# Altium PCB PJ1301-002-A2.PcbDoc
Units mm, origin at the board's own origin, x right, y up, seen from the top; angles counter-clockwise.
Board outline 130 x 50 mm, 4 copper layers (Top Layer, GND, POWER, Bottom Layer), stack 1.602 mm thick; 62 components, 47 nets, 271 pads, 269 vias.
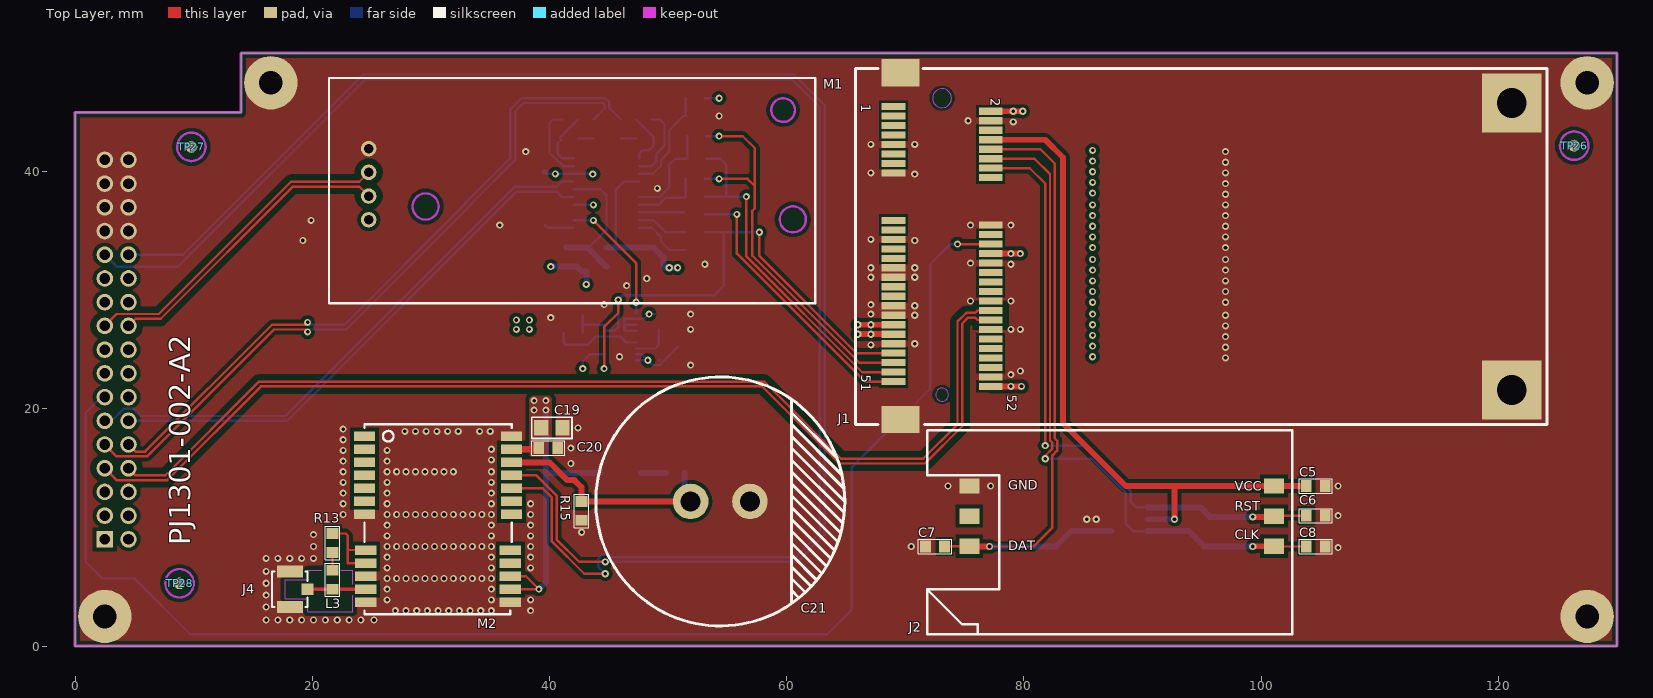
[diagram p0: Top Layer view]
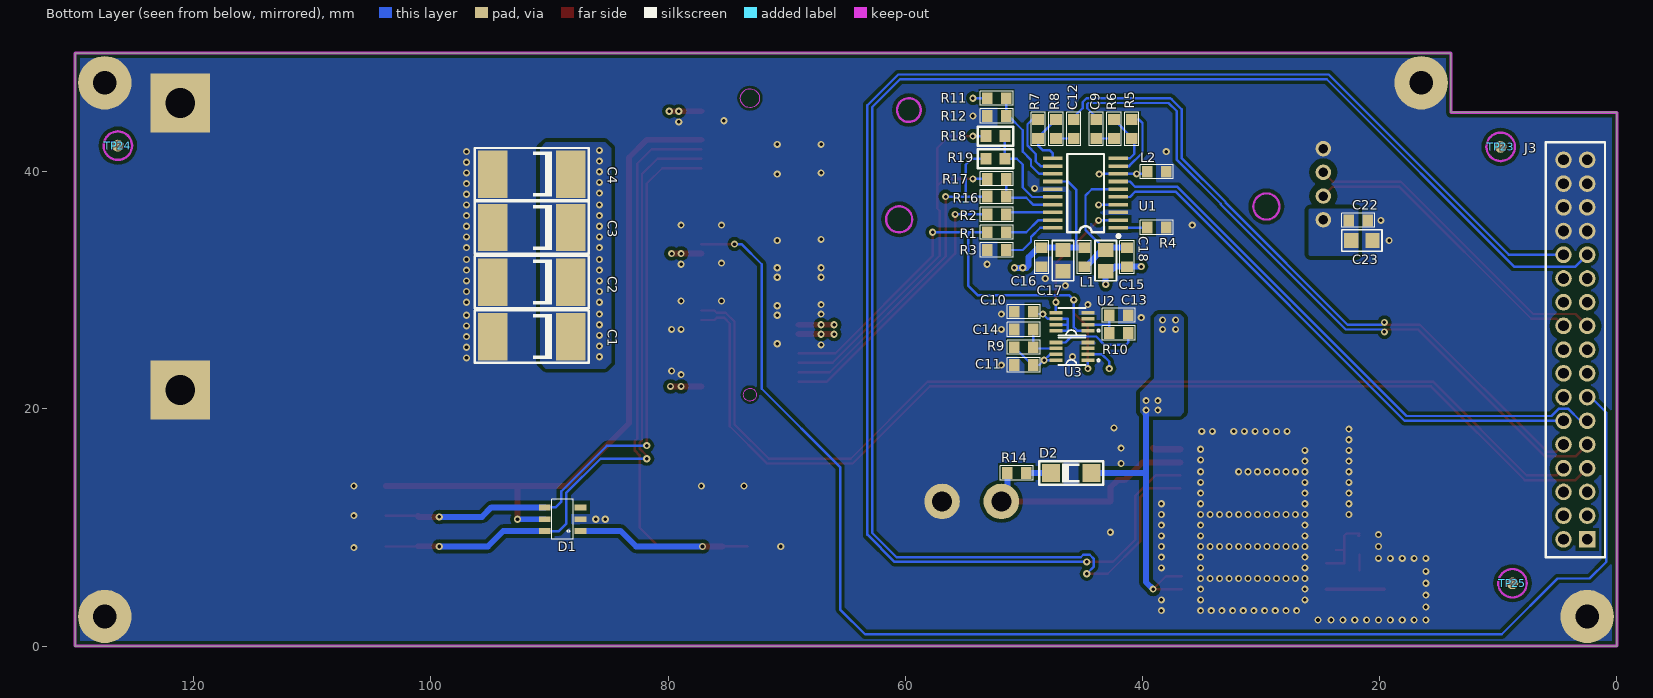
[diagram p1: Bottom Layer view, seen from below]
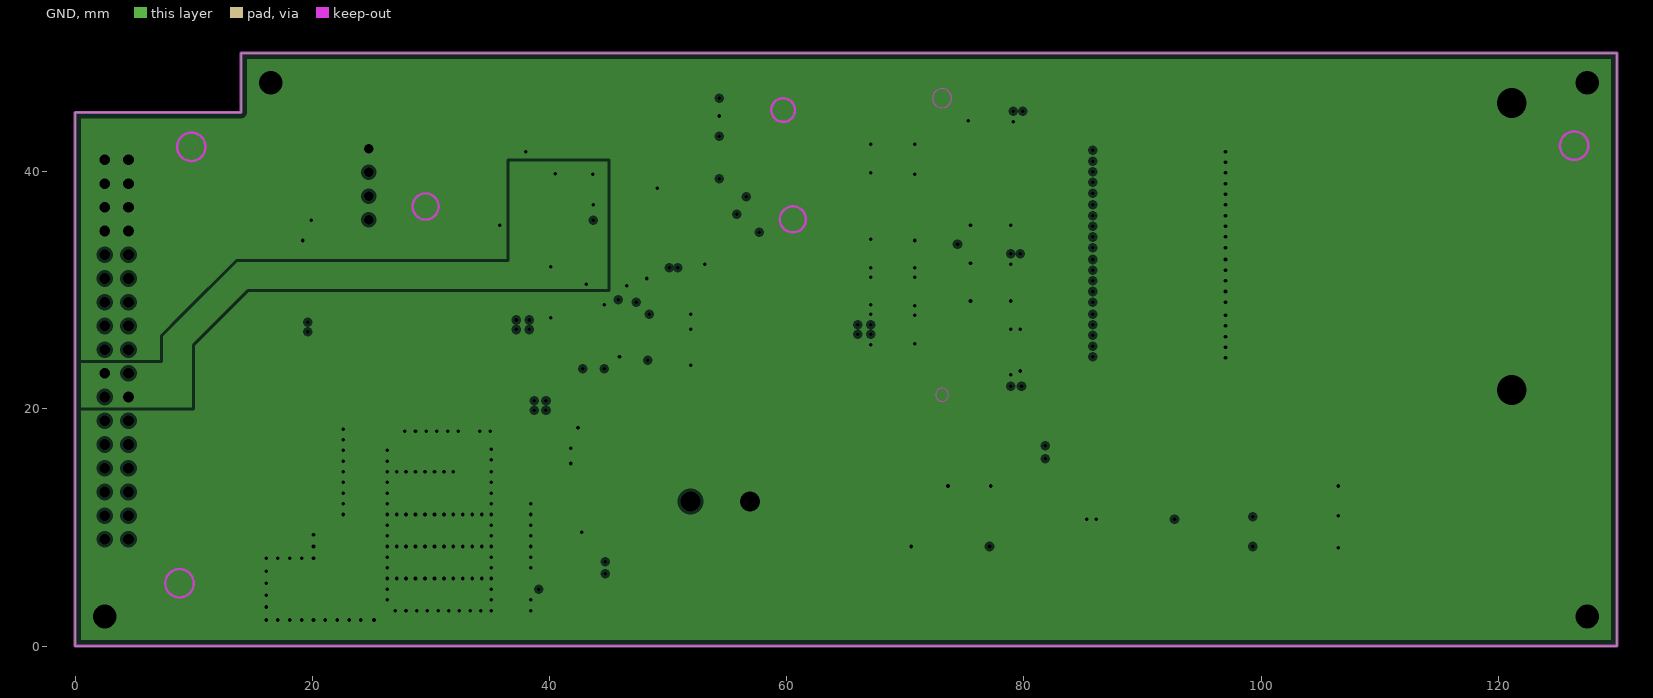
[diagram p2: GND, clearances drawn from the general rule]
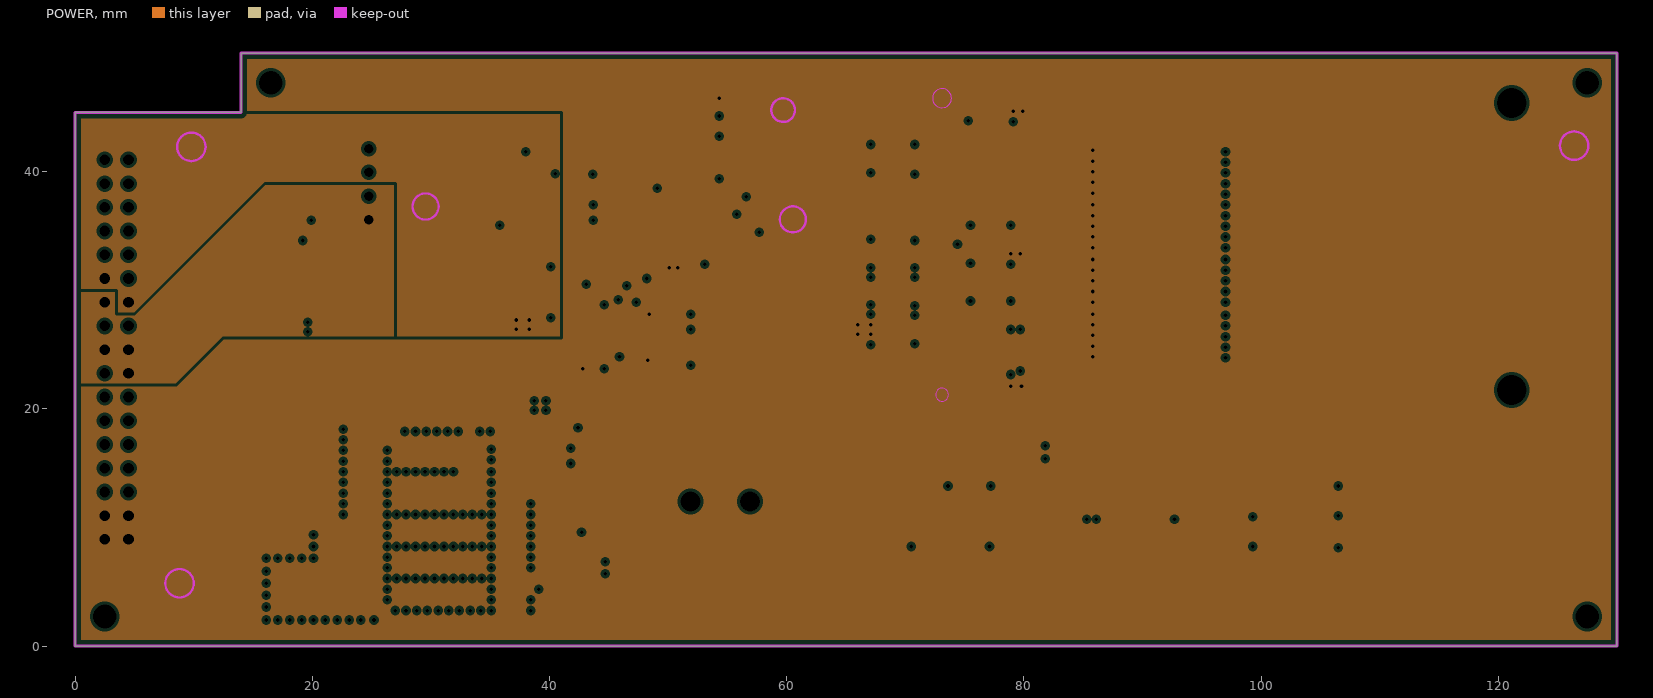
[diagram p3: POWER, clearances drawn from the general rule]

## Layer stack, top to bottom
Top Layer: signal copper 0.0356
Dielectric: core 0.23, FR-4, Dk 4.8
GND: plane copper 0.0356, net (Multiple Nets)
Dielectric: prepreg 1, FR-4, Dk 4.8
POWER: plane copper 0.0356, net (Multiple Nets)
Dielectric: core 0.23, FR-4, Dk 4.8
Bottom Layer: signal copper 0.0356

## Board outline
0,0 130,0 130,50 14,50 14,45 0,45

## Design rules (kind name [scope] priority, off if disabled: settings)
Clearance Clearance_2 [InDifferentialPair('C-USB')  Or InDifferentialPair('WIFI-USB')] p1: gap=0.508
Clearance Clearance_1 [InNet('GND') vs (Not InComponent('J1')) AND (Not InComponent('U2')) AND (Not InComponent('U3'))] p2: gap=0.3
Clearance [All] p3: gap=0.2
ComponentClearance [All] p1: gap=0 collisioncheckmode=3 verticalgap=0 showdistances=FALSE
DiffPairsRouting [All] p1: maxlimit=0.2 minlimit=0.2 mostfreqgap=0.2 maxuncoupledlength=12.7
PlaneClearance [All] p1: clearance=0.254
PlaneConnect [All] p1: planeconnectstyle=Relief reliefexpansion=0.254 reliefentries=4 reliefconductorwidth=0.508 reliefairgap=0.15
PolygonConnect [All] p1: connectstyle=Direct reliefconductorwidth=0.254 reliefentries=4 polygonreliefangle="90 Angle"
RoutingVias [All] p1: holewidth=0.3 width=0.6 viastyle="Through Hole" minholewidth=0.3 minwidth=0.6 maxholewidth=0.3 maxwidth=0.6
SilkscreenOverComponentPads [All] p1: minsilkscreentomaskgap=0.254
SolderMaskExpansion [All] p1: expansion=0.102
Width Width_1 [InNet('NetJ4_1')] p1: maxlimit=0.296 minlimit=0.296 preferedwidth=0.296 impedancedriven=TRUE minimp=50.000000 maximp=50.000000 favimp=50.000000
Width [All] p2: maxlimit=4 minlimit=0.127 preferedwidth=0.2 minimp=50.000000 maximp=50.000000 favimp=50.000000
23 further rules are at their usual default settings.

## Classes and differential pairs
component class wifi: C22 C23 M1
component class gps: C19 C20 C21 D2 J4 L3 M2 R13 R14 R15
component class connector: J3
component class cellular: C1 C2 C3 C4 C5 C6 C7 C8 C9 C10 C11 C12 C13 C14 C15 C16 C17 C18 D1 J1 J2 L1 L2 R1 R2 R3 R4 R5 R6 R7 R8 R9 R10 R11 R12 R16 R17 R18 R19 U1 U2 U3
differential pair WIFI-USB: +WIFI-USB_P -WIFI-USB_N
differential pair C-USB: +C-USB_P -C-USB_N
differential pair AUDIO-OUT: +AUDIO-OUT_P -AUDIO-OUT_N
differential pair AUDIO-IN: +AUDIO-IN_P -AUDIO-IN_N

## Components (designator, comment, footprint, x,y, rotation, side; value= is the part's Value field where it differs from the comment)
C1 "680uF/6.3V" 7343 91.5,26.1 r270 bottom
C2 "680uF/6.3V" 7343 91.5,30.7 r270 bottom
C3 "680uF/6.3V" 7343 91.5,35.3 r270 bottom
C4 "680uF/6.3V" 7343 91.5,39.8 r270 bottom
C5 "0.1uF" 0603 104.6,13.5 r90 top
C6 "33pF" 0603 104.6,11 r90 top
C7 "33pF" 0603 72.5,8.4 r270 top
C8 "33pF" 0603 104.6,8.4 r90 top
C9 "0.22uF/50V" 0603 43.9,43.6 r0 bottom
C10 "0.1uF" 0603 50,28.2 r270 bottom
C11 "0.1uF" 0603 50,23.7 r90 bottom
C12 "0.22uF/50V" 0603 45.8,43.6 r0 bottom
C13 "0.1uF" 0603 42,27.9 r90 bottom
C14 "0.1uF" 0603 50,26.7 r270 bottom
C15 "22uF/6.3V" 0805 43.1,31.6 r90 bottom
C16 "0.1uF" 0603 48.5,32.8 r0 bottom
C17 "22uF/6.3V" 0805 46.7,31.6 r90 bottom
C18 "0.1uF" 0603 41.3,32.8 r0 bottom
C19 "22uF/6.3V" 0805 39.3,18.4 r0 top
C20 "0.1uF" 0603 39.9,16.7 r90 top
C21 "1F/5.5V" SCAP 54.4,12.2 r90 top
C22 "0.1uF" 0603 21.8,35.9 r90 bottom
C23 "22uF/6.3V" 0805 22.4,34.2 r180 bottom
D1 "SRV05-4" SOT23-6 87.4,9.7 r90 bottom
D2 "1N4148" MINI-MELF 44.3,14.6 r0 bottom
J1 "MINI-PCIE" MINI-PCIE 73.1,46.2 r270 top locked
J2 "SIMCARD" SIMLOCK 101.1,9.6 r180 top locked
J3 "COMM_BOARD" HEAD_2MM_2X17 2.5,9 r90 bottom locked
J4 "GPS ANT" ANT 18.1,4.8 r90 top
L1 "300ohm/100MHz BEAD" 0603 44.9,32.8 r0 bottom
L2 "300ohm/100MHz BEAD" 0603 38.8,40 r90 bottom
L3 "27nH" 0603 21.7,5.6 r0 top
M1 "WIFI" WIFI 21.4,47.9 r0 top locked
M2 "NEO-6M" NEO-6 24.4,17.7 r180 top
R1 "0" 0603 52.3,34.9 r90 bottom
R2 "0" 0603 52.3,36.4 r90 bottom
R3 "0" 0603 52.3,33.4 r90 bottom
R4 "0" 0603 38.8,35.3 r90 bottom
R5 "34K" 0603 40.9,43.6 r180 bottom
R6 "34K" 0603 42.4,43.6 r180 bottom
R7 "34K" 0603 48.8,43.6 r180 bottom
R8 "34K" 0603 47.3,43.6 r180 bottom
R9 "10K" 0603 50,25.2 r270 bottom
R10 "10K" 0603 42,26.4 r270 bottom
R11 "0" 0603 52.3,46.2 r270 bottom
R12 "NC" 0603 52.3,44.7 r270 bottom
R13 "10" 0603 21.7,8.7 r180 top
R14 "50" 0603 50.6,14.6 r90 bottom
R15 "NC" 0603 42.7,11.4 r180 top
R16 "0" 0603 52.3,37.9 r90 bottom
R17 "NC" 0603 52.3,39.4 r90 bottom
R18 "0" 0603 52.4,43 r90 bottom
R19 "NC" 0603 52.4,41.1 r90 bottom
TP23 "Comment" MARK 9.8,42.1 r180 bottom locked
TP24 "Comment" MARK 126.4,42.2 r180 bottom locked
TP25 "Comment" MARK 8.8,5.3 r180 bottom locked
TP26 "Comment" MARK 126.4,42.2 r0 top locked
TP27 "Comment" MARK 9.8,42.1 r0 top locked
TP28 "Comment" MARK 8.8,5.3 r0 top locked
U1 "TLV320AIC1106PW" PW020 44.8,38.2 r90 bottom
U2 "NC7SZ74K8X" US8 44.6,26.6 r90 bottom
U3 "NC7SZ74K8X" US8 44.6,24.1 r90 bottom

## Footprints (in the part's own frame and the unit in brackets; to place one, negate y for a bottom-side part, rotate by r counter-clockwise, add the part's x,y. Pads: shape width x height; smd on the part's side, far side on the other; paste and mask are expansions set on the pad)
0603 [mm]
  rect 1x0.9 smd: 1(0,0.8) 2(0,-0.8)
  silkscreen extent -0.6,-1.4 0.6,1.4
0805 [mm]
  rect 1.2x1.3 smd: 1(0,0) 2(1.8,0)
  silkscreen extent -0.8,-0.9 2.6,0.9
7343 [mm]
  rect 4x2.5 smd: 1(0,3.3) 2(0,-3.3)
  silkscreen extent -2.2,-4.8 2.2,4.8
ANT [mm]
  rect 1x1 smd: 1(0,-1.5)
  rect 1x2.2 smd: 2(1.5,0) 3(-1.5,0)
  silkscreen extent -1.5,-1.5 1.5,1.5
HEAD_2MM_2X17 [mm]
  rect 1.4x1.4 hole 0.9: 1(0,0)
  round 1.4 hole 0.9: 2(0,2) 3(2,0) 4(2,2) 5(4,0) 6(4,2) 7(6,0) 8(6,2) 9(8,0) 10(8,2) 11(10,0) 12(10,2) 13(12,0) 14(12,2) 15(14,0) 16(14,2) 17(16,0) 18(16,2) 19(18,0) 20(18,2) 21(20,0) 22(20,2) 23(22,0) 24(22,2) 25(24,0) 26(24,2) 27(26,0) 28(26,2) 29(28,0) 30(28,2) 31(30,0) 32(30,2) 33(32,0) 34(32,2)
  silkscreen extent -1.5,-1.5 33.5,3.5
MARK [mm]
  round 1 smd paste-0.5 mask+0.6: ""(0,0)
  Keep-Out Layer circle w0.2: c0,0 r1.2
MINI-MELF [mil]
  rect 60x60 smd: 1(135,0) 2(0,0)
  silkscreen extent -39,-39 173,39
MINI-PCIE [mm]
  rect 0.6x2 smd: 1(0.7,-4.1) 2(1.1,4.1) 3(1.5,-4.1) 4(1.9,4.1) 5(2.3,-4.1) 6(2.7,4.1) 7(3.1,-4.1) 8(3.5,4.1) 9(3.9,-4.1) 10(4.3,4.1) 11(4.7,-4.1) 12(5.1,4.1) 13(5.5,-4.1) 14(5.9,4.1) 15(6.3,-4.1) 16(6.7,4.1) 17(10.3,-4.1) 18(10.7,4.1) 19(11.1,-4.1) 20(11.5,4.1) 21(11.9,-4.1) 22(12.3,4.1) 23(12.7,-4.1) 24(13.1,4.1) 25(13.5,-4.1) 26(13.9,4.1) 27(14.3,-4.1) 28(14.7,4.1) 29(15.1,-4.1) 30(15.5,4.1) 31(15.9,-4.1) 32(16.3,4.1) 33(16.7,-4.1) 34(17.1,4.1) 35(17.5,-4.1) 36(17.9,4.1) 37(18.3,-4.1) 38(18.7,4.1) 39(19.1,-4.1) 40(19.5,4.1) 41(19.9,-4.1) 42(20.3,4.1) 43(20.7,-4.1) 44(21.1,4.1) 45(21.5,-4.1) 46(21.9,4.1) 47(22.3,-4.1) 48(22.7,4.1) 49(23.1,-4.1) 50(23.5,4.1) 51(23.9,-4.1) 52(24.3,4.1)
  rect 2.3x3.2 smd: ""(-2.15,-3.5) ""(27.1,-3.5)
  rect 5x5 hole 2.5: ""(0.4,48.05) ""(24.6,48.05)
  Keep-Out Layer circle w0.1: c0,0 r0.8
  Keep-Out Layer circle w0.1: c25,0 r0.55
  silkscreen extent -2.5,-7.3 27.5,51
NEO-6 [mm]
  rect 1.8x0.8 smd: 1(0,0) 2(0,1.1) 3(0,2.2) 4(0,3.3) 5(0,4.4) 6(0,5.5) 7(0,6.6) 8(-0.1,9.6) 9(-0.1,10.7) 10(-0.1,11.8) 11(-0.1,12.9) 12(-0.1,14) 13(-12.3,14) 14(-12.3,12.9) 15(-12.3,11.8) 16(-12.3,10.7) 17(-12.3,9.6) 18(-12.4,6.6) 19(-12.4,5.5) 20(-12.4,4.4) 21(-12.4,3.3) 22(-12.4,2.2) 23(-12.4,1.1) 24(-12.4,0)
  silkscreen extent -12.4,-1 0,15
PW020 [mm] "Shrink Small Outline; 20 Leads; Body Width 4.4 mm; Pitch 0.65 mm"
  rect 0.3x1.65 smd: 1(-2.925,-2.775) 2(-2.275,-2.775) 3(-1.625,-2.775) 4(-0.975,-2.775) 5(-0.325,-2.775) 6(0.325,-2.775) 7(0.975,-2.775) 8(1.625,-2.775) 9(2.275,-2.775) 10(2.925,-2.775) 11(2.925,2.775) 12(2.275,2.775) 13(1.625,2.775) 14(0.975,2.775) 15(0.325,2.775) 16(-0.325,2.775) 17(-0.975,2.775) 18(-1.625,2.775) 19(-2.275,2.775) 20(-2.925,2.775)
  silkscreen extent -3.75,-2.9 3.3,1.55
SCAP [mm]
  round 3 hole 1.7: 1(0,2.5) 2(0,-2.5)
  silkscreen extent -10.5,-10.5 10.5,10.5
SIMLOCK [mm]
  rect 1.7x1.3 smd: 1(0,-3.9) 2(0,-1.36) 3(0,1.18) 4(25.7,-3.9) 5(25.7,-1.36) 6(25.7,1.18)
  silkscreen extent -1.53,-8.61 29.25,8.6
SOT23-6 [mm]
  rect 0.5x1 smd: 1(0,0) 2(1,0) 3(2,0) 4(2,3) 5(1,3) 6(0,3)
  silkscreen extent -0.7,0.6 2.7,2.4
US8 [mm]
  rect 0.3x1.1 smd: 1(0,0) 2(0.5,0) 3(1,0) 4(1.5,0) 5(1.5,2.7) 6(1,2.7) 7(0.5,2.7) 8(0,2.7)
  silkscreen extent -0.4,-1 1.9,2.5
WIFI [mm]
  round 1.3 hole 0.8: 1(3.35,-11.95) 2(3.35,-9.95) 3(3.35,-7.95) 4(3.35,-5.95)
  Keep-Out Layer circle w0.2: c39.12,-11.92 r1.1
  Keep-Out Layer circle w0.2: c38.3,-2.7 r1
  Keep-Out Layer circle w0.2: c8.15,-10.83 r1.1
  silkscreen extent 0,-19 41,0

## Part data
C1 C2 C3 C4: library part 10U-6032-20V, "CAP;10U  ,TT,20V ,20%,6032,SMT"
C5 C6 C7 C8 C9 C10 C11 C12 C13 C14 C15 C16 C17 C18 C19 C20: library part "P_CAP NP"
C21: library part "Cap Pol1", "Polarized Capacitor (Radial)"
C22 C23: library part Cap, "Capacitor"
D2: library part 1N4148WS-7-F_SOD323-2
J4: library part HRS_U_0.FL-R-SMT-10
L1 L2: library part INDUCTOR_4
L3: library part 2.2UH_LPS3015-222MLC_1.5A_20%~D
M2: library part NEO-5M
R1 R2 R3 R4 R5 R6 R7 R8 R9 R10 R11 R12 R13 R14 R15 R16 R17 R18 R19: library part P_R
U1: library part TLV320AIC1106PWG4, "PCM CODEC With Microphone Amps & Speaker Driver, 20-Pin TSSOP"
U2 U3: library part NC7SZ74-US8_0, "IC;NC7SZ74,D-TYPE FLIP-FLOP,US8"

## Free pads (board coordinates)
  round 4.5 hole 2: ""(2.5,2.5) ""(16.5,47.5) ""(127.5,2.5) ""(127.5,47.5)

## Via types
v1: diameter 0.6, hole 0.3, Top Layer to Bottom Layer, tented both sides, 269 vias

## Nets (pads, with @x,y where several pads share a name; then routed paths per layer and width w, separated by ;. In a path a pad name is that pad's centre, name@x,y a point inside that pad or via, vN(x,y) a via of type N, cw(c..) or ccw(c..) an arc to the next point about the centre after c; other vN are vias at no path point)
AGND: C15.1 C18.1 J3.14 J3.15 L2.1 U1.4 U1.8 | length 10.1
  Bottom Layer w0.2: L2.1 39.775,39.825 U1.8 43.625,39.825 v1(43.65,39.8) ; U1.4 43.675,37.225 v1(43.7,37.2)
  Bottom Layer w0.508: v1(40.1,32) 41.4,32 42.3,32 42.7,31.6 C15.1 v1(43.1,30.5)
  other v1: 40.5,39.825
AUDIO-IN_N: C9.2 J3.9 | length 59.2
  Top Layer w0.2: J3.9 3.5,16 6.066,16 16.766,26.7 19.4,26.7 v1(19.6,26.5)
  Bottom Layer w0.2: v1(19.6,26.5) 19.8,26.7 22.866,26.7 33.4,37.234 33.4,37.3 37.1,41 37.1,45.1 37.8,45.8 44.55,45.8 44.65,45.7 44.65,45.35 C9.2@43.7,44.4
AUDIO-IN_P: C12.2 J3.10 | length 57.7
  Top Layer w0.2: J3.10 5.1,16.4 5.9,16.4 16.6,27.1 19.4,27.1 v1(19.6,27.3)
  Bottom Layer w0.2: v1(19.6,27.3) 19.8,27.1 22.7,27.1 33,37.4 33,37.466 36.7,41.166 36.7,45.266 37.534,46.1 37.634,46.2 44.716,46.2 45.05,45.866 45.05,45.35 C12.2@46,44.4
AUDIO-OUT_N: J3.11 U1.7 | length 48.4
  Bottom Layer w0.2: J3.11 3.086,19 4.086,20 4.914,20 5.514,19.4 17.734,19.4 37.059,38.725 40.609,38.725 41.059,39.175 U1.7
AUDIO-OUT_P: J3.12 U1.5 | length 45.7
  Bottom Layer w0.2: J3.12 7.3,19 17.9,19 37.225,38.325 40.609,38.325 41.059,37.875 U1.5
AVDD: C15.2 C18.2 L1.1 U1.6 | length 12.4
  Bottom Layer w0.2: U1.6 44.275,38.525 44.8,38 44.8,35.1 43.25,33.55 C15.2
  Bottom Layer w0.508: C18.2@41.4,33.6 43.2,33.6 43.25,33.55 L1.1@44.8,32
BCKP: C21.1 M2.22 R14.1 R15.2 | length 19.1
  Top Layer w0.508: M2.22 40,15.5 41.5,14 42.1,14 42.7,13.4 R15.2 C21.1@51.4,12.2
  Bottom Layer w0.508: C21.1@51.4,12.2 R14.1
C-PWR: C1.1 C2.1 C3.1 C4.1 C10.1 C11.2 C16.2 C17.2 J1.2 J1.24 J1.39 J1.41 J1.52 J3.1 J3.2 J3.3 J3.4 L1.2 R9.2 R11.2 U1.14 U2.6 U2.7 U2.8 U3.2 U3.7 U3.8 | length 43.3
  Top Layer w0.5: v1(66,26.3) J1.41 ; v1(66,27.1) J1.39 ; J1.52 v1(79.8,21.9) ; J1.24 v1(79.7,33.1) ; J1.2 v1(79.9,45.1)
  Bottom Layer w0.2: v1(42.8,23.4) 42.8,24 43.4,24.6 U3.2 ; 45.6,33.6 45.6,38.5 46.275,39.175 U1.14 ; U3.8 v1(48.3,24.1) ; U3.7 47.8,24.6 v1(48.3,24.1) ; U2.8 46.3,26.6 46.3,27.1 ; U2.7 46.3,27.1 ; C10.1@48.9,28 v1(48.4,28) 48,27.6 U2.6 46.3,27.6 46.3,27.1 ; C11.2@49.2,24.1 C11.2@49.3,24.1 ; R9.2 49.3,23.7 C11.2 48.7,23.7 v1(48.3,24.1) ; R11.2 v1(54.3,46.2)
  Bottom Layer w0.508: L1.2@44.8,33.6 45.6,33.6 48.8,33.6 49.6,32.8 49.6,32.1 49.8,31.9 v1(50.8,31.9)
  other v1: 78.9,21.9 85.8,24.4 85.8,25.3 85.8,26.2 67.1,26.3 67.1,27.1 85.8,27.1 85.8,28 85.8,29 85.8,29.9 85.8,30.8 85.8,31.7 50.1,31.9 85.8,32.6 78.9,33.1 85.8,33.6 85.8,34.5 85.8,35.4 85.8,36.3 85.8,37.2 85.8,38.2 85.8,39.1 85.8,40 85.8,40.9 85.8,41.8 79.1,45.1
C-RESET: J1.22 J3.13 | length 120.4
  Top Layer w0.2: v1(74.4,33.9) J1.22
  Bottom Layer w0.2: J3.13 2.2,21 0.9,19.7 0.9,7.1 2.3,5.7 5,5.7 9.7,1 63.4,1 65.5,3.1 65.5,15.1 72.1,21.7 72.1,32.2 73.8,33.9 v1(74.4,33.9)
C-USB_N: J1.36 J3.8 | length 89.2
  Top Layer w0.2: J3.8 5.1,14.4 7.6,14.4 15.3,22.1 15.5,22.3 58.1,22.3 64.6,15.8 71.5,15.8 74.4,18.7 74.4,27.366 75.134,28.1 75.9,28.1 76.059,28.259 76.059,28.3 J1.36
C-USB_P: J1.38 J3.7 | length 91.4
  Top Layer w0.2: J3.7 3.5,14 7.766,14 15.666,21.9 57.934,21.9 64.434,15.4 71.666,15.4 74.8,18.534 74.8,27.2 75.3,27.7 75.9,27.7 76.059,27.541 76.059,27.5 J1.38
GND: C1.2 C2.2 C3.2 C4.2 C5.2 C6.2 C7.2 C8.2 C10.2 C11.1 C13.2 C14.2 C16.1 C17.1 C19.2 C20.2 C21.2 C22.2 C23.2 D1.2 J1. J1.4 J1.9 J1.15 J1.18 J1.21 J1.26 J1.27 J1.29 J1.34 J1.35 J1.37 J1.40 J1.43 J1.50 J2.4 J3.27 J3.28 J3.29 J3.30 J3.31 J3.32 J3.33 J3.34 J4.2 J4.3 L2.2 M1.4 M2.7 M2.10 M2.12 M2.13 M2.24 pad. R3.1 R4.2 R12.2 R15.1 U1.3 U1.15 U2.4 U3.4
  other v1: 16.1,2.2 17.1,2.2 18.1,2.2 19.1,2.2 20.1,2.2 21.1,2.2 22.1,2.2 23.1,2.2 24.1,2.2 25.2,2.2 27,3 27.9,3 28.8,3 29.7,3 30.6,3 31.5,3 32.4,3 33.3,3 34.2,3 35.1,3 38.4,3 16.1,3.3 26.3,3.9 35.1,3.9 38.4,3.9 16.1,4.3 26.3,4.8 35.1,4.8 16.1,5.3 26.3,5.7 27.1,5.7 27.9,5.7 28.7,5.7 29.5,5.7 30.3,5.7 31.1,5.7 31.9,5.7 32.7,5.7 33.5,5.7 34.3,5.7 35.1,5.7 16.1,6.3 26.3,6.6 35.1,6.6 38.4,6.6 16.1,7.4 17.1,7.4 18.1,7.4 19.1,7.4 20.1,7.4 26.3,7.5 35.1,7.5 38.4,7.5 106.5,8.3 20.1,8.4 26.3,8.4 27.1,8.4 27.9,8.4 28.7,8.4 29.5,8.4 30.3,8.4 31.1,8.4 31.9,8.4 32.7,8.4 33.5,8.4 34.3,8.4 35.1,8.4 38.4,8.4 70.5,8.4 26.3,9.3 35.1,9.3 38.4,9.3 20.1,9.4 42.7,9.6 26.3,10.2 35.1,10.2 38.4,10.2 85.3,10.7 86.1,10.7 106.5,11 22.6,11.1 26.3,11.1 27.1,11.1 27.9,11.1 28.7,11.1 29.5,11.1 30.3,11.1 31.1,11.1 31.9,11.1 32.7,11.1 33.5,11.1 34.3,11.1 35.1,11.1 38.4,11.1 22.6,12 26.3,12 35.1,12 38.4,12 22.6,12.9 26.3,12.9 35.1,12.9 73.6,13.5 77.2,13.5 106.5,13.5 22.6,13.8 26.3,13.8 35.1,13.8 22.6,14.7 26.3,14.7 27.1,14.7 27.9,14.7 28.7,14.7 29.5,14.7 30.3,14.7 31.1,14.7 31.9,14.7 35.1,14.7 41.8,15.4 22.6,15.6 26.3,15.6 35.1,15.7 22.6,16.5 26.3,16.5 35.1,16.6 41.8,16.7 22.6,17.4 27.8,18.1 28.7,18.1 29.6,18.1 30.5,18.1 31.4,18.1 32.3,18.1 34.1,18.1 35,18.1 22.6,18.3 42.4,18.4 78.9,22.9 79.7,23.2 51.9,23.7 97,24.3 45.9,24.4 97,25.2 67.1,25.4 70.8,25.5 97,26.1 51.9,26.7 78.9,26.7 79.7,26.7 97,27 40.1,27.7 70.8,27.9 97,27.9 51.9,28 67.1,28 70.8,28.7 44.6,28.8 67.1,28.8 97,29 75.5,29.1 78.9,29.1 97,29.9 46.5,30.4 97,30.8 48.2,31 67.1,31.1 70.8,31.1 97,31.7 67.1,31.9 70.8,31.9 53.1,32.2 78.9,32.2 75.5,32.3 97,32.6 97,33.6 19.2,34.2 70.8,34.2 67.1,34.3 97,34.5 97,35.4 35.8,35.5 75.5,35.5 78.9,35.5 19.9,35.9 97,36.3 97,37.2 97,38.1 49.1,38.6 97,39 70.8,39.8 67.1,39.9 97,39.9 97,40.8 38,41.7 97,41.7 67.1,42.3 70.8,42.3 79.1,44.2 75.3,44.3 54.3,44.7
GPS-PWR: C19.1 C20.1 D2.2 J3.22 J3.23 M2.14 M2.15 M2.23 | length 27.3
  Top Layer w0.2: M2.14 v1(39.1,4.8) 38,5.9 M2.15
  Top Layer w0.508: M2.23 39,16.6 C20.1
  Bottom Layer w0.508: v1(39.1,4.8) 39.7,5.4 v1(39.7,19.9) ; 39.908,14.592 44.292,14.592 D2.2
  other v1: 38.7,19.9 38.7,20.7 39.7,20.7 37.2,26.7 38.3,26.7 37.2,27.5 38.3,27.5
GPS-RXD: J3.26 M2.21 | length 134.8
  Top Layer w0.2: M2.21 38.9,14.4 40.6,12.7 40.6,9 42.5,7.1 v1(44.7,7.1)
  Bottom Layer w0.2: J3.26 9.1,33 24.3,48.2 60.6,48.2 63.2,45.6 63.2,9.4 60.9,7.1 v1(44.7,7.1)
GPS-TXD: J3.25 M2.20 | length 138.4
  Top Layer w0.2: M2.20 39.434,13.3 40.2,12.534 40.2,8.834 42.934,6.1 v1(44.7,6.1)
  Bottom Layer w0.2: J3.25 3.5,32 8.666,32 24.466,47.8 60.434,47.8 62.8,45.434 62.8,9.566 60.734,7.5 45.2,7.5 45,7.7 44.451,7.7 44.1,7.349 44.1,6.7 v1(44.7,6.1)
LINSEL: R11.1 R12.1 U1.13 | length 8.8
  Bottom Layer w0.2: U1.13 48.725,39.825 49.4,40.5 49.4,41 50.1,41.7 50.1,43.5 51.3,44.7 R12.1 R11.1
NetC9_1: C9.1 R6.2 | length 1.3
  Bottom Layer w0.2: R6.2 C9.1@43.7,42.8
NetC12_1: C12.1 R8.2 | length 1.3
  Bottom Layer w0.2: C12.1@46,42.8 R8.2
NetC13_1: C13.1 R10.2 U2.2 | length 3.3
  Bottom Layer w0.2: R10.2 42.8,27.05 ; C13.1 42.8,27.05 ; U2.2 42.85,27.1 42.8,27.05
NetC14_1: C14.1 R9.1 U3.6 | length 3.3
  Bottom Layer w0.2: U3.6 48.9,25.1 49.2,25.4 C14.1
NetD2_1: D2.1 R14.2 | length 2.1
  Bottom Layer w0.508: D2.1 R14.2
NetJ4_1: J4.1 L3.2 M2.11 | length 4.9
  Top Layer w0.296: J4.1 M2.11
NetL3_1: L3.1 R13.1 | length 1.3
  Top Layer w0.2: L3.1 R13.1@21.7,7.7
NetM2_8: M2.8 M2.9 R13.2 | length 6
  Top Layer w0.2: R13.2@21.7,9.3 R13.2@21.8,9.3 ; R13.2 22.8,9.5 23,9.3 23,8.1 ; M2.8@23.7,8.1 23,8.1 ; M2.9 23,7 23,8.1
NetR1_2: R1.2 U1.19 | length 4.3
  Bottom Layer w0.2: U1.19 48.775,35.925 49.8,34.9 R1.2
NetR2_2: R2.2 U1.18 | length 3.8
  Bottom Layer w0.2: U1.18 R2.2@51.325,36.575
NetR3_2: R3.2 U1.20 | length 4.9
  Bottom Layer w0.2: U1.20 48.625,35.275 49.4,34.5 49.4,34.1 50.1,33.4 R3.2
NetR4_1: R4.1 U1.1 | length 2.5
  Bottom Layer w0.2: R4.1@39.6,35.5 39.825,35.275 U1.1
NetR5_1: R5.1 U1.9 | length 6.2
  Bottom Layer w0.2: R5.1@41.1,44.4 40.3,44.4 40,44.1 40,41.6 41.125,40.475 U1.9
NetR5_2: R5.2 R6.1 U1.10 | length 5
  Bottom Layer w0.2: R5.2 40.9,42.9 R6.1 ; R5.2@41,42.7 40.7,42.4 40.7,41.5 41.075,41.125 U1.10
NetR7_1: R7.1 U1.12 | length 6.3
  Bottom Layer w0.2: U1.12 48.6,40.475 49,40.875 49,41.5 49.7,42.2 49.7,44 49.3,44.4 R7.1@48.6,44.4
NetR7_2: R7.2 R8.1 U1.11 | length 4.8
  Bottom Layer w0.2: R8.1 48.8,42.9 R7.2 48.8,42.2 48.4,41.8 47.8,41.8 47.575,41.575 U1.11
NetR10_1: R10.1 U3.5 | length 7.5
  Bottom Layer w0.2: R10.1 41.2,25.6 41.4,25.4 43.199,25.4 43.903,26.104 45.996,26.104 46.5,25.6 U3.5
NetR16_2: R16.2 R17.2 U1.17 | length 5.6
  Bottom Layer w0.2: U1.17 49.225,37.225 49.8,37.8 R16.2@51.4,37.8 ; R16.2 R17.2
NetR18_2: R18.2 R19.2 U1.16 | length 8.4
  Bottom Layer w0.2: U1.16 49.3,37.875 50.1,38.675 50.1,40.6 50.6,41.1 R19.2 R18.2
PCM-CLK: J1.45 R1.1 U2.1 U3.1 | length 45.8
  Top Layer w0.2: v1(44.6,23.4) 44.6,26.9 45.8,28.1 v1(45.8,29.2) ; v1(57.7,34.9) 57.7,32.897 65.897,24.7 J1.45
  Bottom Layer w0.2: v1(44.6,23.4) U3.1 ; U2.1 45.5,26.6 45.8,26.9 v1(45.8,29.2) 46.2,29.6 53.9,29.6 54.7,30.4 54.7,34.9 ; R1.1 54.7,34.9 ; v1(57.7,34.9) 54.7,34.9
PCM-DIN: J1.49 R16.1 R19.1 | length 29.6
  Top Layer w0.2: v1(56.6,37.9) 56.6,32.866 66.366,23.1 J1.49
  Bottom Layer w0.2: R16.1 54.9,37.9 ; R19.1 54.4,41.1 54.9,40.6 54.9,37.9 ; v1(56.6,37.9) 54.9,37.9
PCM-DOUT: J1.47 R17.1 R18.1 | length 33.8
  Top Layer w0.2: v1(54.3,39.4) 56.7,39.4 57.3,38.8 ; v1(54.3,43) 56.3,43 57.3,42 57.3,38.8 ; J1.47 66.131,23.9 57.1,32.931 57.1,36.7 57.3,36.9 57.3,38.8
  Bottom Layer w0.2: R17.1 v1(54.3,39.4) ; R18.1 v1(54.3,43)
PCM-SYNC: J1.51 R2.1 | length 23.7
  Top Layer w0.2: v1(55.8,36.4) 55.8,33.1 66.6,22.3 J1.51
  Bottom Layer w0.2: R2.1 v1(55.8,36.4)
RST#: U1.2 U2.5 | length 11
  Top Layer w0.2: v1(43.7,35.9) 47.3,32.3 v1(47.3,29)
  Bottom Layer w0.2: U1.2 43.675,35.925 v1(43.7,35.9) ; U2.5 v1(47.3,29)
SIMCLK: C8.1 D1.6 J1.12 J2.3 | length 56.5
  Top Layer w0.2: J1.12 80.9,41.1 82.2,39.8 82.2,17.349 82.4,17.149 82.4,16.651 81.8,16.051 v1(81.8,15.8) ; J2.3 101.12,8.4 C8.1
  Top Layer w0.5: v1(99.3,8.4) 99.32,8.42 J2.3
  Bottom Layer w0.2: v1(81.8,15.8) 85.7,15.8 88.6,12.9 88.6,10.3 89.2,9.7 D1.6
  Bottom Layer w0.5: D1.6 93.9,9.7 95.2,8.4 v1(99.3,8.4)
SIMDATA: C7.1 D1.1 J1.10 J2.6 | length 57.5
  Top Layer w0.2: C7.1 73.32,8.42 J2.6 ; v1(77.1,8.4) 80.8,8.4 82.4,10 82.4,16.086 82.8,16.486 82.8,17.314 82.6,17.514 82.6,40.7 81.4,41.9 J1.10
  Top Layer w0.5: J2.6 75.42,8.4 v1(77.1,8.4)
  Bottom Layer w0.5: v1(77.1,8.4) 82.7,8.4 84,9.7 D1.1
SIMRST: C6.1 D1.4 J1.14 J2.2 | length 52.2
  Top Layer w0.2: J1.14 80.5,40.3 81.8,39 v1(81.8,16.9) ; J2.2@101.14,11 C6.1
  Top Layer w0.5: v1(99.3,10.9) 101.04,10.9 J2.2
  Bottom Layer w0.2: v1(81.8,16.9) 85.166,16.9 89,13.066 89,12.2 89.5,11.7 D1.4
  Bottom Layer w0.5: D1.4 94.9,11.7 95.7,10.9 v1(99.3,10.9)
SIMVCC: C5.1 D1.5 J1.8 J2.1 | length 56.9
  Top Layer w0.5: J1.8 81.8,42.7 83.3,41.2 83.3,18.8 88.6,13.5 92.7,13.5 ; v1(92.7,10.7) 92.7,13.5 ; C5.1 J2.1 92.7,13.5
  Bottom Layer w0.5: D1.5 v1(92.7,10.7)
WIFI-PWR: C22.1 C23.1 J3.16 J3.17 J3.18 J3.21 M1.1
WIFI-USB_N: J3.20 M1.2 | length 25.4
  Top Layer w0.2: J3.20 5.1,27.6 7.216,27.6 18.366,38.75 23.95,38.75 M1.2
WIFI-USB_P: J3.19 M1.3 | length 27.6
  Top Layer w0.2: J3.19 3.5,28 7.05,28 18.2,39.15 23.95,39.15 M1.3
pads on no net: D1.3 J1.1 J1.3 J1.5 J1.6 J1.7 J1.11 J1.13 J1.16 J1.17 J1.19 J1.20 J1.23 J1.25 J1.28 J1.30 J1.31 J1.32 J1.33 J1.42 J1.44 J1.46 J1.48 J2.5 J3.5 J3.6 J3.24 M2.1 M2.2 M2.3 M2.4 M2.5 M2.6 M2.16 M2.17 M2.18 M2.19 TP23. TP24. TP25. TP26. TP27. TP28. U2.3 U3.3

## Polygon pours and split planes (outlines as drawn)
WIFI-PWR on Bottom Layer "Bottom Layer-GND" (solid, pour order 7): 22,36.9 25.5,36.9 25.9,36.9 26,36.8 26,34.2 26,33 25.9,32.9 21.9,32.9 21.8,33 21.8,35 21.8,36.8 21.9,36.9
GPS-PWR on Bottom Layer "Bottom Layer-GND" (solid, pour order 10): 37,28 38.7,28 39,27.7 39,26.6 39,22.6 40.2,21.4 40.2,20 40.2,19.7 39.9,19.4 37.2,19.4 36.8,19.4 36.5,19.7 36.5,27.7 36.8,28
C-PWR on Bottom Layer "Bottom Layer-GND" (solid, pour order 9): 85.3,23.4 84.8,23.9 84.8,24 84.8,42 85.3,42.5 90.3,42.5 90.8,42 90.8,24.2 90.8,23.9 90.3,23.4
GND on Bottom Layer "Bottom Layer-No Net" (solid, remove dead copper, pour order 12): 0,0 130,0 130,50 14,50 14,45 0,45
GPS-PWR on Top Layer "Bottom Layer-GND" (solid, remove dead copper, pour order 11): 38.3,16.9 38.3,20.8 38.3,20.9 38.5,21.1 40,21.1 40.2,20.9 40.2,20.5 40.2,17.6 39.9,17.3 39.9,16.1 39.7,15.9 38.6,15.9 38.5,15.9 38.3,16.1
GND on Top Layer "Bottom Layer-No Net" (solid, remove dead copper, pour order 8): 0,0 130,0 130,50 14,50 14,45 0,45
AGND on GND (split plane): 44.871,30.129 14.6,30.129 14.55,30.12 14.508,30.092 9.908,25.492 9.88,25.45 9.871,25.4 9.871,20.129 0.51,20.129 0.51,23.871 7.3,23.871 7.35,23.88 7.392,23.908 7.42,23.95 7.429,24 7.429,26.146 9.092,27.808 13.654,32.371 36.5,32.371 36.55,32.38 36.592,32.408 36.62,32.45 36.629,32.5 36.629,40.871 44.871,40.871
GND on GND (split plane): 129.49,0.51 0.51,0.51 0.51,19.871 10,19.871 10.05,19.88 10.092,19.908 10.12,19.95 10.129,20 10.129,25.346 14.654,29.871 31,29.871 45,29.871 45.05,29.88 45.092,29.908 45.12,29.95 45.129,30 45.129,41 45.12,41.05 45.092,41.092 45.05,41.12 45,41.129 36.5,41.129 36.45,41.12 36.408,41.092 36.38,41.05 36.371,41 36.371,32.629 13.6,32.629 13.55,32.62 13.508,32.592 8.908,27.992 7.208,26.292 7.18,26.25 7.171,26.2 7.171,24.129 0.51,24.129 0.51,44.49 14,44.49 14.1,44.499 14.195,44.528 14.284,44.576 14.361,44.639 14.424,44.716 14.472,44.805 14.501,44.9 14.51,45 14.51,49.49 129.49,49.49
GPS-PWR on POWER (split plane): 40.871,26.129 27.129,26.129 27.129,39 27.12,39.05 27.092,39.092 27.05,39.12 27,39.129 16,39.129 15.95,39.12 15.908,39.092 4.946,28.129 3.629,28.129 3.629,30 3.62,30.05 3.592,30.092 3.55,30.12 3.5,30.129 0.51,30.129 0.51,44.49 14,44.49 14.1,44.499 14.195,44.528 14.284,44.576 14.361,44.639 14.424,44.716 14.472,44.805 14.492,44.871 40.871,44.871
WIFI-PWR on POWER (split plane): 26.871,26.129 12.5,26.129 12.45,26.12 12.408,26.092 8.446,22.129 0.51,22.129 0.51,29.871 3.371,29.871 3.371,28 3.38,27.95 3.408,27.908 3.45,27.88 3.5,27.871 5,27.871 5.05,27.88 5.092,27.908 16.054,38.871 26.871,38.871
C-PWR on POWER (split plane): 129.49,0.51 0.51,0.51 0.51,21.871 8.5,21.871 8.55,21.88 8.592,21.908 12.554,25.871 41,25.871 41.05,25.88 41.092,25.908 41.12,25.95 41.129,26 41.129,45 41.12,45.05 41.092,45.092 41.05,45.12 41,45.129 14.51,45.129 14.51,49.49 129.49,49.49

## Keep-outs
Top Layer:
  lines w0.1: 20.8,6.4 19.6,6.4 19.6,5.6 17.7,5.6 17.7,4 19.6,4 19.6,2.9 19.8,2.9 23.4,2.9 23.4,4.3 ; 22.4,6.4 23.4,6.4 23.4,5.2
Keep-Out Layer:
  lines w0.254: 0,0 0,45 14,45 14,50 114.465,50 130,50 130,0 0,0

## Other copper
GND (plane layer: these items are gaps in the copper):
  lines w0.254: 0,18.6 0.1,18.5 ; 0,20 10,20 10,25.4 ; 0,24 7.3,24 7.3,26.2 9,27.9 13.6,32.5 36.5,32.5 36.5,41 45,41 45,30 31.5,30 31,30 ; 10,25.4 10,25.4 ; 10,25.4 14.6,30 31,30 ; 31,30 31,30
POWER (plane layer: these items are gaps in the copper):
  lines w0.254: 0,22 8.5,22 12.5,26 27,26 ; 0,30 3.5,30 ; 14,45 33.5,45 39,45 41,45 41,26 27,26 ; 3.5,28 3.5,30 ; 3.5,28 5,28 16,39 27,39 27,26 ; 3.5,28 3.5,30 ; 27,26 27,26 ; 27,26 27,26

## Silkscreen, mask and mechanical layers (free items; w line width, h text height)
Top Overlay:
  text "PJ1301-002-A2" at 10.3,8.5 h3 r90

## Text inside footprints (layer, text, board x,y; h text height)
J1: Top Overlay "51" at 66.3,22.9 h0.8 r270; Top Overlay "52" at 78.6,21.2 h0.8 r270; Top Overlay "2" at 77.2,46.2 h0.8 r270; Top Overlay "1" at 66.3,45.7 h0.8 r270
J2: Top Overlay "DAT" at 78.7,8.1 h0.8; Top Overlay "GND" at 78.7,13.2 h0.8; Top Overlay "CLK" at 97.8,9 h0.8; Top Overlay "RST" at 97.8,11.4 h0.8; Top Overlay "VCC" at 97.8,13.1 h0.8